# Altium PCB V2.3.PcbDoc
Units mm, origin at the board's own origin, x right, y up, seen from the top; angles counter-clockwise.
Board outline 50 x 60 mm, 2 copper layers (Top Layer, Bottom Layer), stack 1.57 mm thick; 57 components, 44 nets, 218 pads, 88 vias.
Unrouted connection lines stored in the file: 2.
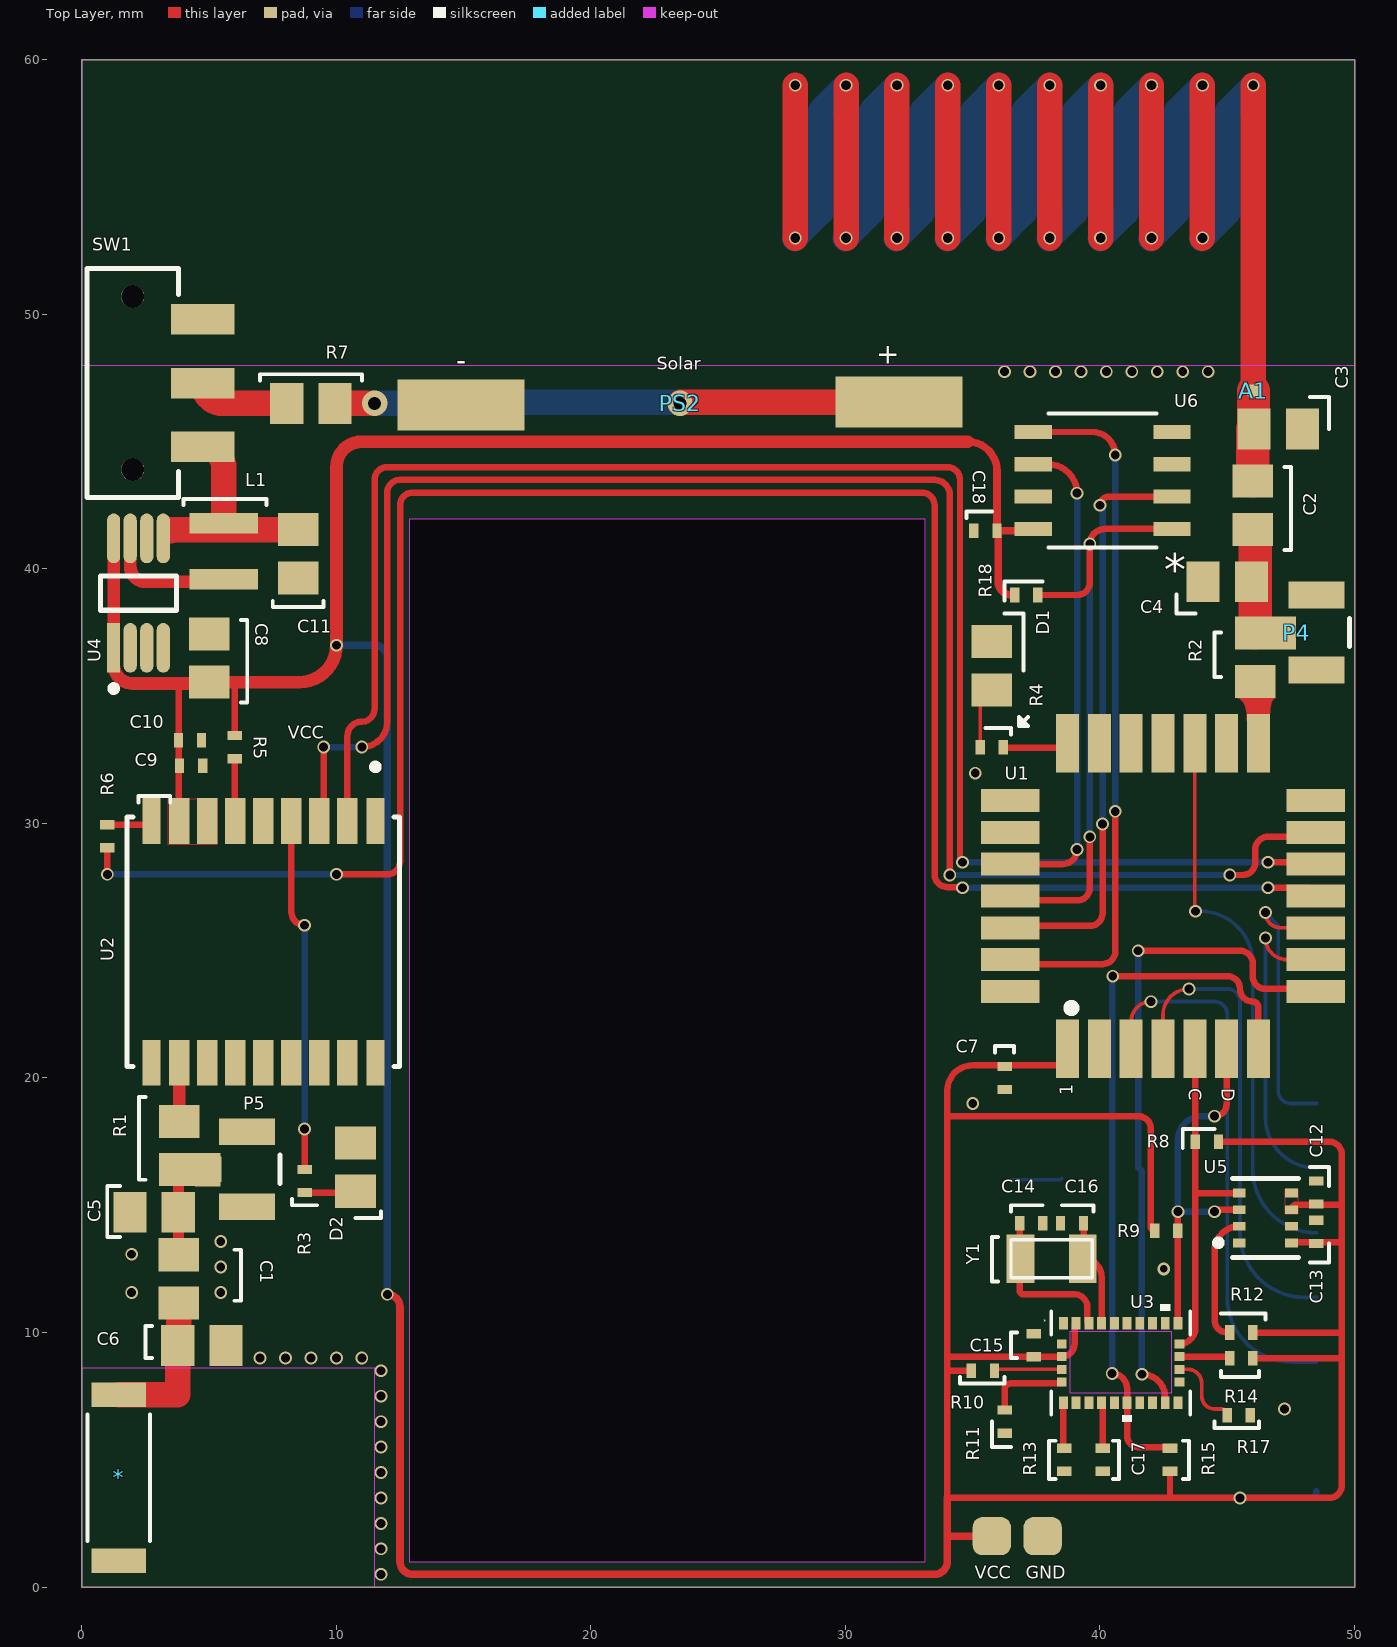
[diagram p0: Top Layer view]
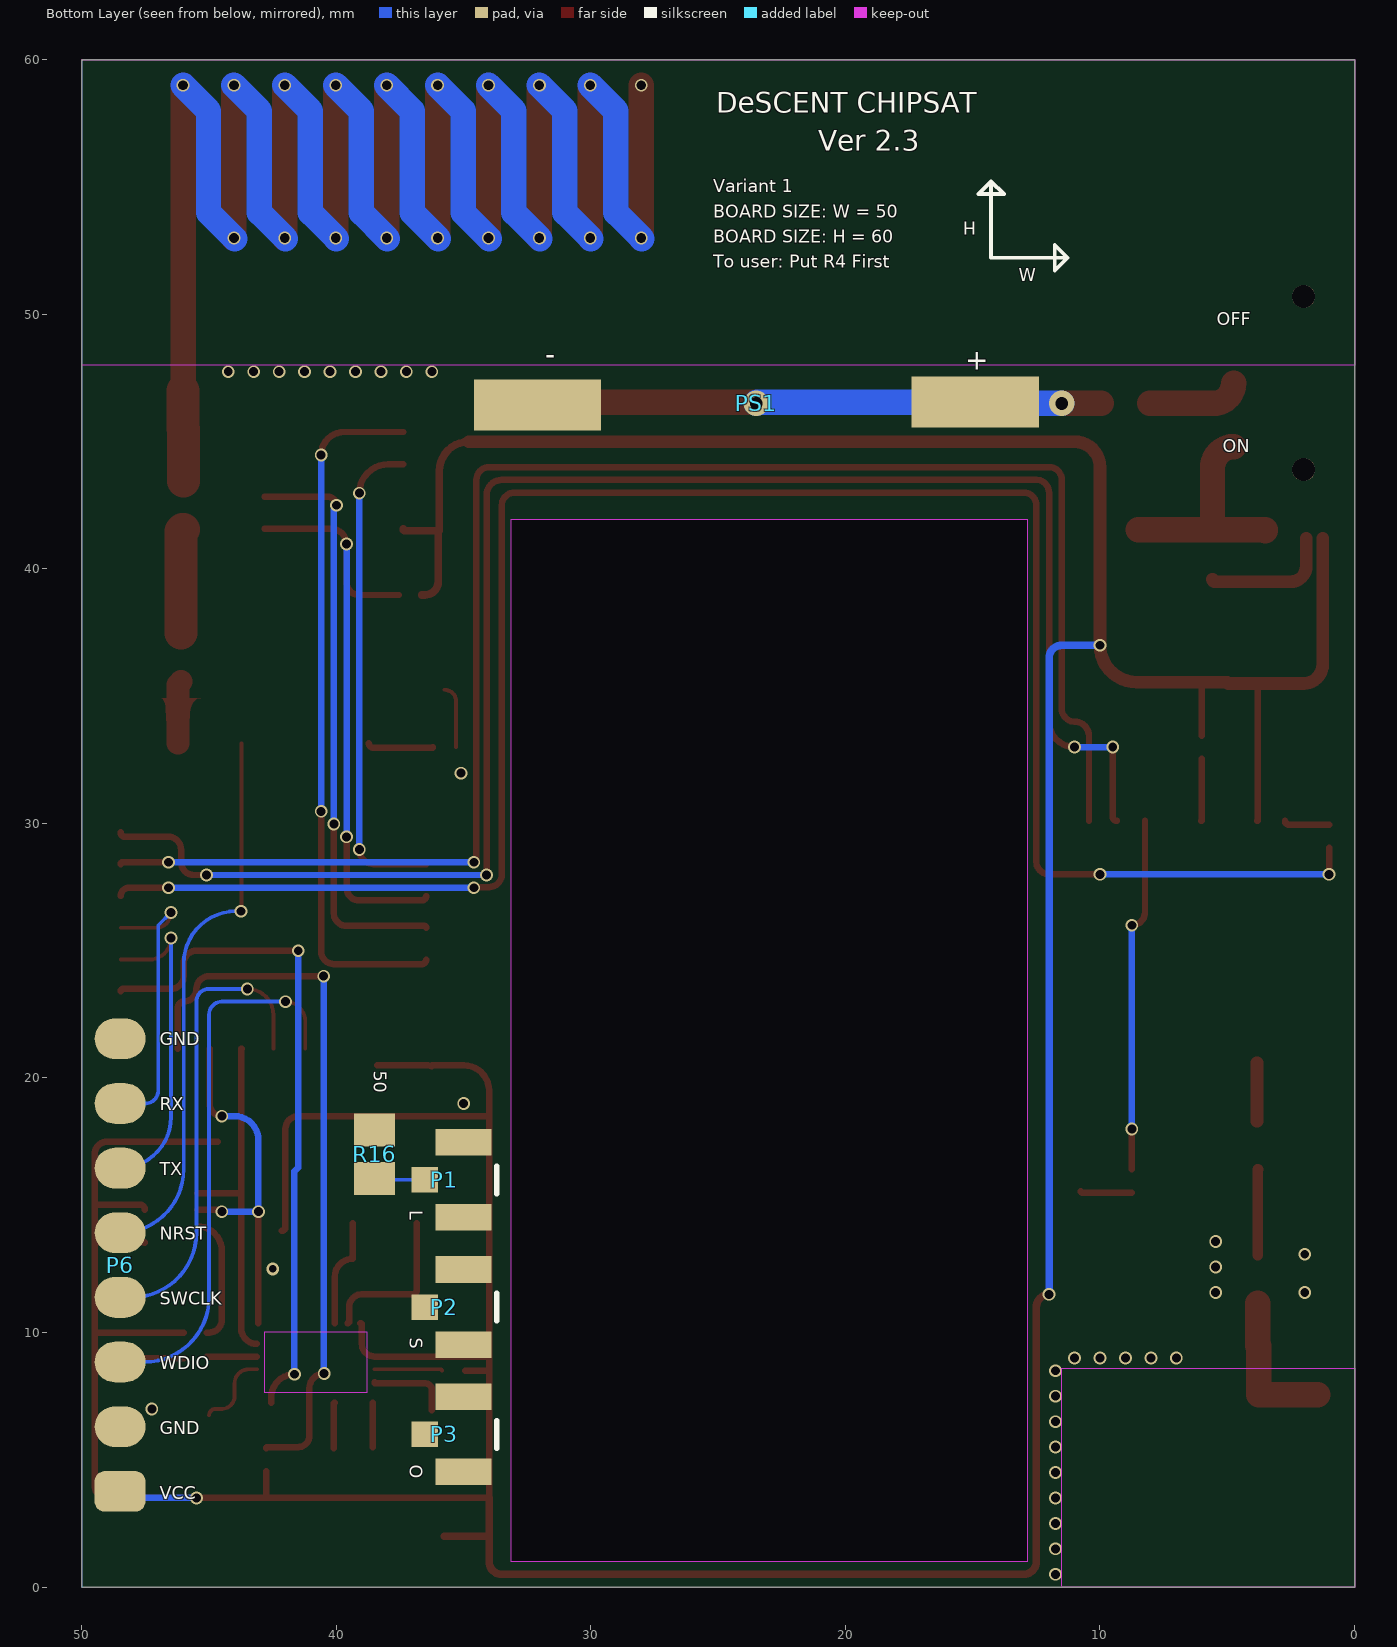
[diagram p1: Bottom Layer view, seen from below]

## Layer stack, top to bottom
Top Solder: solder mask 0.0254, SM-001, Dk 4
Top Layer: signal copper 0.035
Dielectric 1: dielectric 1.5, FR-4, Dk 4.8
Bottom Layer: signal copper 0.035
Bottom Solder: solder mask 0.0254, SM-001, Dk 4

## Board outline
0,0 0,60 50,60 50,0
cut-out: 33.138,1 33.138,41.95 12.862,41.95 12.862,1

## Design rules (kind name [scope] priority, off if disabled: settings)
Clearance [All] p1: gap=0.1 ignorepadtopadclearanceinfootprint=TRUE
ComponentClearance ComponentClearance_1 [InComponent('PS1')] p1: gap=0 collisioncheckmode=3 verticalgap=0 showdistances=FALSE
ComponentClearance [All] p2: gap=0 collisioncheckmode=3 verticalgap=0 showdistances=FALSE
MaxMinImpedance "Schematic Impedance Constraint_3" [InNet('LoRa_ANT_Tuning')] p1: minimum=49.00 maximum=51.00
MaxMinImpedance "Schematic Impedance Constraint_2" [InNet('PI_NETWORK_LoRa')] p2: minimum=49.00 maximum=51.00
MaxMinImpedance "Schematic Impedance Constraint_1" [InNet('LoRa_ANT')] p3: minimum=49.00 maximum=51.00
MaxMinImpedance "Schematic Impedance Constraint" [InNet('PI_NETWORK_GPS')] p4: minimum=49.00 maximum=51.00
PlaneClearance [All] p1 off: clearance=0.508
PlaneConnect PlaneConnect_1 [InNet('VCC')] p1: planeconnectstyle=Direct reliefexpansion=0.508 reliefentries=4 reliefconductorwidth=0.254 reliefairgap=0.254
PlaneConnect [InNet('GND')] p2: planeconnectstyle=Direct reliefexpansion=0.508 reliefentries=4 reliefconductorwidth=0.254 reliefairgap=0.254
PolygonConnect [All] p1: connectstyle=Direct reliefconductorwidth=0.254 reliefentries=4 polygonreliefangle="90 Angle" airgapwidth=0.254
RoutingVias [All] p1: holewidth=0.711 width=1.27 viastyle="Through Hole" minholewidth=0.711 minwidth=1.27 maxholewidth=0.711 maxwidth=1.27
SolderMaskExpansion [All] p1: expansion=0.102 istentingtop=FALSE
SupplyNets "Schematic Supply Nets_1" [InNet('VCC')] p1: voltage=0.000
SupplyNets "Schematic Supply Nets" [InNet('GND')] p2: voltage=0.000
Width Width_1 [All] p1 off: maxlimit=0.254 minlimit=0.254 preferedwidth=0.254
Width [All] p2: maxlimit=2 minlimit=0.14 preferedwidth=0.254 minimp=50.000000 maximp=50.000000 favimp=50.000000 checkconnectedcopper=TRUE // min width
27 further rules are at their usual default settings.

## Classes and differential pairs
polygon class PolygonClass_1: GND_L01_P006

## Components (designator, comment, footprint, x,y, rotation, side; value= is the part's Value field where it differs from the comment)
* "GPS_ANT_NO_KO" GPS_ANT_NO_KO 0.949,4.2 r90 top
A1 "TI_HELICAL" TI_HELICAL 28,47 r0 top
C1 "C0402C223K8PACTU" PI_NET_CAPACITOR_0805 3.802,12.104 r270 top value="22,000 pF"
C2 "C0402C223K8PACTU" PI_NET_CAPACITOR_0805 46,42.5 r90 top value="22,000 pF"
C3 "C0402C223K8PACTU" PI_NET_CAPACITOR_0805 47,45.5 r0 top value="22,000 pF"
C4 "C0402C223K8PACTU" PI_NET_CAPACITOR_0805 45,39.5 r180 top value="22,000 pF"
C5 "C0402C223K8PACTU" PI_NET_CAPACITOR_0805 2.837,14.72 r180 top value="22,000 pF"
C6 "C0402C223K8PACTU" PI_NET_CAPACITOR_0805 4.716,9.488 r0 top value="22,000 pF"
C7 "4.7uF" 0402 36.25,20 r270 top
C8 "47uF" 0805Cap 5,36.5 r270 top value="22,000 pF"
C9 "0.1uF" 0402 4.248,33.273 r0 top
C10 "10uF" 0402 4.294,32.273 r0 top
C11 "47uF" 0805Cap 8.501,40.595 r90 top value="22,000 pF"
C12 "0.1uF" 0402 48.5,15.5 r90 top
C13 "10uF" 0402 48.5,13.954 r90 top
C14 "22pF" 0402 37.3,14.3 r0 top
C15 "0.1uF" 0402 37.4,9.5 r90 top
C16 "22pF" 0402 38.9,14.3 r180 top
C17 "0.1uF" 0402 40.1,5 r270 top
C18 "100nF" 0402 35.5,41.5 r180 top
D1 "LTST-C191TBKT" 0805LED 35.75,36.2 r270 top
D2 "LTST-C191TBKT" 0805LED 10.75,16.5 r270 top
L1 "10uH" "ASPI-0315FS_ASPI-0315FS - The_real_one" 5.58,40.699 r90 top
P1 "U.FL-R-SMT-1(01)" UFL 35,16 r270 bottom
P2 "U.FL-R-SMT-1(01)" UFL 35,11 r270 bottom
P3 "U.FL-R-SMT-1(01)" UFL 35,6 r270 bottom
P4 "U.FL-R-SMT-1(01)" UFL 48.5,37.5 r270 top
P5 "U.FL-R-SMT-1(01)" UFL 6.486,16.416 r270 top
P6 "61300811121" "8pinhead Slightly wider" 48.5,12.65 r90 bottom
PS1 "ALTA_CELL" ALTA_CELL_SAME_SIZED_FEET_SLIM 23.5,46.5 r90 bottom
PS2 "ALTA_CELL" ALTA_CELL_SAME_SIZED_FEET_SLIM 23.5,46.5 r90 top
R1 "0805Resistor" 0805Res 3.832,17.348 r270 top
R2 "0805Resistor" 0805Res 46.1,36.525 r90 top
R3 "1k" 0402 8.75,15.954 r270 top
R4 "1k6" 0402 35.75,33 r0 top
R5 "0k" 0402 6,33 r270 top
R6 "0k" 0402 1,29.5 r90 top
R7 "0805Resistor" 0805Res 9,46.5 r180 top
R8 "2.2k" 0402 44.2,17.5 r0 top
R9 "2.2k" 0402 42.6,14 r180 top
R10 "10k" 0402 35.4,8.5 r180 top
R11 "10k" 0402 36.25,6.5 r270 top
R12 "4.7k" 0402 45.546,10 r0 top
R13 "10k" 0402 38.6,5 r270 top
R14 "10k" 0402 45.546,8.996 r180 top
R15 "10k" 0402 42.75,5 r270 top
R16 "0805Resistor" RCL_M0805 38.5,17 r90 bottom
R17 "10k" 0402 45.454,6.75 r0 top
R18 "10k" 0402 37.1,38.975 r0 top
SW1 "JS102011SAQN" Slide_Switch 2,47.302 r270 top
U1 "MODULE_LORA_E5" MODULE28P-1-25-12X12X2-5MM 42.475,27.15 r90 top
U2 "MAX-M10S-00B" GPS_MAX_10 7.132,25.348 r270 top
U3 "BNO085" QFN28_BNO086_CEV 40.814,8.805 r0 top
U4 "L6920" L6920DBTR 2.225,39.05 r90 top
U5 "BME280" FP-BME280-MFG 46.5,14.5 r180 top
U6 "W25Q16JVSNIQ" SOIC_150MIL_WIN 40.1,43.475 r180 top
Y1 "IMU_CLK_9HT10-32.768KBZF-T" IMU_CLK_XTAL320X150X75 38.1,12.9 r180 top

## Footprints (in the part's own frame and the unit in brackets; to place one, negate y for a bottom-side part, rotate by r counter-clockwise, add the part's x,y. Pads: shape width x height; smd on the part's side, far side on the other; paste and mask are expansions set on the pad)
"8pinhead Slightly wider" [mm] "Pin Header, pitch 2.54 mm, THT, Vertical, single row, 8p"
  rrect50% 1.6x2 smd: 1(-8.89,0)
  oval 1.6x2 smd: 2(-6.35,0) 3(-3.81,0) 4(-1.27,0) 5(1.27,0) 6(3.81,0) 7(6.35,0) 8(8.89,0)
0402 [mm]
  rect 0.365x0.572 smd paste+0 mask+0: 1(-0.454,0) 2(0.454,0)
  body extent -0.5,-0.25 0.5,0.25, height 0.4
0805Cap [mm]
  rect 1.3x1.6 smd: 1(-0.95,0) 2(0.95,0)
  body extent -1,-0.63 1,0.63, height 0.7
0805LED [mm]
  rect 1.3x1.6 smd: 1(-0.95,0) 2(0.95,0)
  body extent -1,-0.63 1,0.63, height 1.1
0805Res [mm]
  rect 1.3x1.6 smd: 1(-0.95,0) 2(0.95,0)
  body extent -1,-0.63 1,0.63, height 0.6
ALTA_CELL_SAME_SIZED_FEET_SLIM [mm] "SAME SIZED FEET AND CORRECT POLARITY AND SILK CUT"
  rect 2x5 smd: +(0.056,-8.603) -(-0.055,8.603)
"ASPI-0315FS_ASPI-0315FS - The_real_one" [mil]
  rect 31.5x106.3 smd: 1(-43.31,0) 2(43.31,0)
  body extent -59,-59 59,59, height 30
FP-BME280-MFG [mm]
  rect 0.5x0.35 smd paste+0 mask+0: 1(1.025,0.975) 2(1.025,0.325) 3(1.025,-0.325) 4(1.025,-0.975) 5(-1.025,-0.975) 6(-1.025,-0.325) 7(-1.025,0.325) 8(-1.025,0.975)
  silkscreen extent -1.3,-1.55 1.97,1.55, body extent -1.25,-1.25 1.25,1.25, height 1
GPS_ANT_NO_KO [mm]
  rect 0.963x2.16 smd paste+0 mask+0: 1(3.363,-0.5) 2(-3.163,-0.5)
  silkscreen extent -2.39,-1.73 2.59,0.73, body extent -3.49,-1.6 3.69,0.61, height 0.89
GPS_MAX_10 [mm]
  rect 1.8x0.7 smd paste-1000 mask+0: 1(-4.75,4.4) 9(-4.75,-4.4) 10(4.75,-4.4) 18(4.75,4.4)
  rect 1.8x0.8 smd paste-1000 mask+0: 2(-4.75,3.3) 3(-4.75,2.2) 4(-4.75,1.1) 5(-4.75,0) 6(-4.75,-1.1) 7(-4.75,-2.2) 8(-4.75,-3.3) 11(4.75,-3.3) 12(4.75,-2.2) 13(4.75,-1.1) 14(4.75,0) 15(4.75,1.1) 16(4.75,2.2) 17(4.75,3.3)
  silkscreen extent -7,-5.35 4.9,5.35, body extent -5.75,-5.45 5.75,5.45, height 0.25
IMU_CLK_XTAL320X150X75 [mil]
  rect 43x75 smd: 1(-48,0) 2(48,0)
  silkscreen extent -63,-30 63,30, body extent -63,-30 63,30, height 33
L6920DBTR [mm]
  rect 1.954x0.516 smd paste+0 mask+0: 1(-2.15,0.975)
  rrect100% 1.954x0.516 smd paste+0 mask+0: 2(-2.15,0.325) 3(-2.15,-0.325) 4(-2.15,-0.975) 5(2.15,-0.975) 6(2.15,-0.325) 7(2.15,0.325) 8(2.15,0.975)
  silkscreen extent -3.87,-1.5 0.67,1.5, body extent -2.45,-1.5 2.45,1.5, height 1.1
MODULE28P-1-25-12X12X2-5MM [mm]
  rect 2.3x0.9 smd: 1(-6,3.75) 2(-6,2.5) 3(-6,1.25) 4(-6,0) 5(-6,-1.25) 6(-6,-2.5) 7(-6,-3.75) 15(6,-3.75) 16(6,-2.5) 17(6,-1.25) 18(6,0) 19(6,1.25) 20(6,2.5) 21(6,3.75)
  rect 0.9x2.3 smd: 8(-3.75,-6) 9(-2.5,-6) 10(-1.25,-6) 11(0,-6) 12(1.25,-6) 13(2.5,-6) 14(3.75,-6) 22(3.75,6) 23(2.5,6) 24(1.25,6) 25(0,6) 26(-1.25,6) 27(-2.5,6) 28(-3.75,6)
  silkscreen extent -4.53,3.47 -4.27,3.73, body extent -7.15,-7.15 7.15,7.15, height 2.49
PI_NET_CAPACITOR_0805 [mm]
  rect 1.3x1.6 smd: 1(-0.95,0) 2(0.95,0)
  body extent -1,-0.63 1,0.63, height 0.6
QFN28_BNO086_CEV [mil]
  rect 13.78x19 smd paste+0 mask+0: 1(-88.58,61.5) 6(-88.58,-61.5) 7(-68.9,-61.5) 8(-49.21,-61.5) 9(-29.53,-61.5) 10(-9.84,-61.5) 11(9.84,-61.5) 12(29.53,-61.5) 13(49.21,-61.5) 14(68.9,-61.5) 15(88.58,-61.5) 20(88.58,61.5) 21(68.9,61.5) 22(49.21,61.5) 23(29.53,61.5) 24(9.84,61.5) 25(-9.84,61.5) 26(-29.53,61.5) 27(-49.21,61.5) 28(-68.9,61.5)
  rect 15x13.78 smd paste+0 mask+0: 2(-91,29.53) 3(-91,9.84) 4(-91,-9.84) 5(-91,-29.53) 16(91,-29.53) 17(91,-9.84) 18(91,9.84) 19(91,29.53)
  silkscreen extent -108,-91 107,91, body extent -102,-75 102,75, height 46
RCL_M0805 [mm]
  rect 1.3x1.6 smd: 1(-0.95,0) 2(0.95,0)
Slide_Switch [mm] "JS102011SAQN"
  rect 1.2x2.5 smd paste+0 mask+0: 1(-2.5,2.75) 2(0,2.75) 3(2.5,2.75)
  round 0.9 hole 0.9 unplated paste-2539.97 mask+0: ""(-3.4,0) ""(3.4,0)
  silkscreen extent -4.5,-1.8 4.5,1.8, body extent -4.5,-3.75 4.5,3.75, height 3.22
SOIC_150MIL_WIN [mil]
  rect 57.5x22 smd paste+0 mask+0: 1(-107.25,75) 2(-107.25,25) 3(-107.25,-25) 4(-107.25,-75) 5(107.25,-75) 6(107.25,-25) 7(107.25,25) 8(107.25,75)
  silkscreen extent -84,-104 84,104, body extent -122,-99 122,99, height 69
TI_HELICAL [mm] "https://www.ti.com/lit/an/swra416/swra416.pdf?ts=1758177641491&ref_url=https%253A%252F%252Fduckduckgo.com%252F"
  rrect50% 0.5x0.5 smd mask+0: 1(18.024,0)
  Top Layer lines w1: 0.024,6 0.024,12 ; 2.024,6 2.024,12 ; 4.024,6 4.024,12 ; 6.024,6 6.024,12 ; 8.024,6 8.024,12 ; 10.024,6 10.024,12 ; 12.024,6 12.024,12 ; 14.024,6 14.024,12 ; 16.024,6 16.024,12 ; 18.024,0 18.024,12
  Bottom Layer lines w1: 0,5.977 1,6.977 ; 1.024,7.001 1.024,11 2.024,12 ; 2,5.977 3,6.977 ; 3.024,7.001 3.024,11 4.024,12 ; 4,5.977 5,6.977 ; 5.024,7.001 5.024,11 6.024,12 ; 6,5.977 7,6.977 ; 7.024,7.001 7.024,11 8.024,12 ; 8,5.977 9,6.977 ; 9.024,7.001 9.024,11 10.024,12 ; 10,5.977 11,6.977 ; 11.024,7.001 11.024,11 12.024,12 ; 12,5.977 13,6.977 ; 13.024,7.001 13.024,11 14.024,12 ; 14,5.977 15,6.977 ; 15.024,7.001 15.024,11 16.024,12 ; 16,5.977 17,6.977 ; 17.024,7.001 17.024,11 18.024,12
UFL [mm] "SMT, 3-Leads, Body 2.6x2.6mm"
  rect 1.05x2.2 smd: 1(-1.475,0) 2(1.475,0)
  rect 1x1.05 smd: 3(0,-1.525)
  silkscreen extent -0.55,1.3 0.55,1.3, body extent -1.3,-1.3 1.3,1.3, height 1.25

## Part data
* A1: "helical_antenna schematic for the DeSCENT v1 ChipSat"
C1 C2 C3 C4 C5 C6: library part 0805RFCapacitor_NO_SILK, "CAP0805", Capacitance="22,000 pF", Manufacturer=Kemet, Package=C0402-BB, Temperature="-55°C to +125°C", Temperature Characteristic=X5R, Temperature Coefficient=15%, Temperature Range High=+125°C, Temperature Range Low=-55°C, Tolerance=0.1, Voltage Rating="10 V", Automotive=No, Category=Cap, ComponentLink2Description=Datasheet, ComponentLink2URL=https://content.kemet.com/datasheets/KEM_C1002_X7R_SMD.pdf, Device Class L1="Passive Components", Device Class L2=Capacitors, Device Class L3="Ceramic Capacitors", Digikey Description="CAP CER 0.022UF 10V X5R 0402", Height=0.55mm, Ipc Land Pattern Name=CAPC10050X50, Lead Free=Yes, Manufacturer Part Number=C0402C223K8PACTU, Material=Ceramic, Mouser Description="Multilayer Ceramic Capacitors MLCC - SMD/SMT 10volts 22000pF X5R 10%", Octopart=https://octopart.com/c0402c223k8pactu-kemet-140074, RoHS=TRUE
C7 C9 C10 C12 C13 C14 C15 C16 C17: library part C-EUC0805K, "CAPACITOR, European symbol", DeviceName=C0805K, DeviceSetName=C-EU, GateName_1=G$1, LibraryName=rcl, SymbolName_1=C-EU
C8 C11: library part 0805Capacitor, "CAP CER 0.022UF 10V X5R 0402", Capacitance="22,000 pF", Manufacturer=Kemet, Manufacturer Part Number=C0402C223K8PACTU, Package=C0402-BB, Temperature="-55°C to +125°C", Temperature Characteristic=X5R, Temperature Coefficient=15%, Temperature Range High=+125°C, Temperature Range Low=-55°C, Tolerance=0.1, Voltage Rating="10 V", Automotive=No, Category=Cap, ComponentLink2Description=Datasheet, ComponentLink2URL=https://content.kemet.com/datasheets/KEM_C1002_X7R_SMD.pdf, Device Class L1="Passive Components", Device Class L2=Capacitors, Device Class L3="Ceramic Capacitors", Digikey Description="CAP CER 0.022UF 10V X5R 0402", Height=0.55mm, Ipc Land Pattern Name=CAPC10050X50, Lead Free=Yes, Material=Ceramic, Mouser Description="Multilayer Ceramic Capacitors MLCC - SMD/SMT 10volts 22000pF X5R 10%", Octopart=https://octopart.com/c0402c223k8pactu-kemet-140074, RoHS=TRUE
C18: library part RCL_C-EUC0805, Package=RCL_C0805, DeviceName=C0805, DeviceSetName=RCL_C-EU, GateName_1=G$1, LibraryName=AmbaSat-1v1-01-NO-solar, SymbolName_1=RCL_C-EU
D1 D2: library part 0805LED, "LED BLUE CLEAR CHIP SMD", Case Code (Imperial)=0603, Case Code (Metric)=1608, Color=Blue, Forward Current=20mA, Forward Voltage=3.8V, Lens Color=Colorless, Max Operating Temperature=80°C, Max Power Dissipation=75mW, Min Operating Temperature=-20°C, Package Quantity=1, Power Dissipation=76mW, Reverse Voltage=5V, Case/Package=0603, Depth=1.6mm, Dominant Wavelength=475nm, Height=0.55mm, Illumination Color=Blue, Lead Free="Lead Free", Length=0.8mm, Lens Style=Diffused, Lens Transparency=Clear, Luminous Intensity=180mcd, Mount="Surface Mount", Number of Elements=1, Number of LEDs=1, Number of Pins=2, Packaging="Tape and Reel", Radiation Hardening=No, Test Current=20mA, Viewing Angle=130°, Wavelength=468nm, Width=0.8mm
L1: library part ASPI-0315FS, DeviceSetName=ASPI-0315FS, GateName_1=G$1, LibraryName=ASPI-0315FS, SymbolName_1=ASPI-0315FS
P1 P2 P3 P4 P5: library part UFL, "Ultra Small Coaxial Connector, 6 GHz, -40 to 90 degC, 3-Pin SMD, RoHS, Bulk", Dielectric Material=LiquidCrystalPolymer(LCP), Frequency - Max=6GHz, Housing Color=Silver, Manufacturer="Hirose Electric", Operating Temperature=-40degC~90degC, Package Description="3-Pin Surface Mount Device, Body 2.6 x 2.6 mm", Package Reference=U.FL-R-SMT, Standard Package=100, Body Finish=Silver, Body Material=PhosphorBronze, Category=Connectors,Interconnects, Center Contact Material=PhosphorBronze, Center Contact Plating=Gold, Connector Style=U.FL, Connector Type=Jack,MalePin, Contact Termination=Solder, Datasheet URL=https://datasheet.ciiva.com/26945/getdatasheetpartid-475239-26945414.pdf, Datasheet Version=Feb-09, Dynamic Catalog=U.FLSeries, Family=CoaxialConnectors(RF), Fastening Type=Snap-On, Featured Product=HiroseU.FLSeries, Impedance=50Ohm, Manufacturer URL=https://www.hirose.com, Minimum Quantity=UltraMiniatureCoaxial, Mounting Type=SurfaceMount, Online Catalog=U.FLSeries, Other Names="H122041 / U.FL-R-SMT-1(01)-ND", Packaging=Bulk, Quantity Available=Bulk, Series=U.FL, Shield Termination=Solder, Unit PriceUSD=U.FL
P6: library part 8pinhead, Color=Black, Contact Resistance=20mΩ, Current Rating=3A, Max Operating Temperature=105°C, Min Operating Temperature=-40°C, Operating Supply Voltage=250V, Connector Type="Male Pin", Contact Material=Copper, Contact Mating Length=5.9944mm, Contact Plating=Gold, Gender=Male, Height=8.54mm, Lead Pitch=2.54mm, Mount="Through Hole", NexarPartId=32855533, Number of Contacts=8, Number of Pins=8, Number of Positions=8, Number of Rows=1, Orientation=Vertical, Packaging=Bulk, Pitch=2.54mm, REACH SVHC=Unknown, RoHS=Compliant, Termination=Solder, Voltage Rating=250V
PS1 PS2: library part ALTA_CELL_RESIZED_SLIM, "No SILK", DeviceSetName=ALTA_CELL, GateName_1=G$1, LibraryName=ALTA_CELL, SymbolName_1=ALTA_CELL
R1 R2 R7 R16: "RESISTOR, European symbol", DeviceName=M0805, DeviceSetName=R-EU_, GateName_1=G$1, LibraryName=rcl, SymbolName_1=R-EU
R3 R4 R5 R6 R8 R9 R10 R11 R12 R13 R14 R15 R17 R18: library part R-EU_M0805, "RESISTOR, European symbol", DeviceName=M0805, DeviceSetName=R-EU_, GateName_1=G$1, LibraryName=rcl, SymbolName_1=R-EU
SW1: library part Slide_Switch, "SWITCH SLIDE SPDT 300MA 6V /  / JS102011SAQN", Case/Package=100, Contact Current Rating=300mA, Contact Resistance=70mR, Max Operating Temperature=85°C, Max Voltage Rating (DC)=6V, Min Operating Temperature=-40°C, Package Quantity=1, Actuator Length=2mm, Actuator Material=Nylon, Actuator Type=Standard, Contact Material="Copper Alloy", Contact Plating=Silver, Current Rating=300mA, Electrical Life=5000Cycles, Housing Material=Nylon, Illumination Type=Non-Illuminated, Lead Free="Lead Free", Length=9mm, Max Current Rating=300mA, Mount="Surface Mount", Orientation="Right Angle", Packaging="Tape and Reel", Radiation Hardening=No, REACH SVHC="No SVHC", Switch Function=On-On, Switch Travel=2mm, Termination="Gull Wing", Throw Configuration=SPDT, Voltage Rating (DC)=6V
U1: Package=MODULE28P-1.25-12X12X2.5MM, DeviceSetName=MODULE_LORA_E5, GateName_1=G$1, LibraryName=LORA-E5_Eagle_Library, SymbolName_1=MOUDLE_LORA_E5
U2: library part GPS_MAX_10, "GNSS LCC RX, ROM, TCXO, LNA, SAW"
U3: library part BNO086, "No Description Available", Mfr_Name=CEVA, RefDes=RefDes, Type="Motion Sensors"
U4: library part L6920DBTR, "Voltage stepper upper L6920DTR model", DeviceSetName=L6920, GateName_1=G$1, LibraryName=L6920, SymbolName_1=L6920
U5: "Temp and huminity sensor"
U6: "No Description Available", Mfr_Name=Winbond, RefDes=RefDes, Type=Type
Y1: "32.768 kHz Â±50ppm Crystal 12.5pF 70 kOhms 2-SMD, No Lead", Package="SMD-2 TXC Corporation", Check_prices=https://www.snapeda.com/parts/9HT10-32.768KBZF-T/TXC/view-part/?ref=eda, MF=TXC, MP=9HT10-32.768KBZF-T, SnapEDA_Link=https://www.snapeda.com/parts/9HT10-32.768KBZF-T/TXC/view-part/?ref=snap

## Free pads (board coordinates)
  rect 1x1.3 smd: 1(47.193,37.48) 3(4.945,16.397)
  rect 0.5x1 smd: 2(3.794,16.412)
  rrect50% 1.5x1.5 smd: GND(37.75,2) VCC(35.75,2)

## Via types
v1: diameter 0.5, hole 0.35, Top Layer to Bottom Layer, tented both sides, 35 vias
v2: diameter 0.5, hole 0.35, Top Layer to Bottom Layer, 31 vias
v3: diameter 0.5, hole 0.38, Top Layer to Bottom Layer, 19 vias
v4: diameter 1, hole 0.5, Top Layer to Bottom Layer, tented both sides, 2 vias
v5: diameter 0.5, hole 0.3, Top Layer to Bottom Layer, tented both sides, 1 vias

## Nets (pads, with @x,y where several pads share a name; then routed paths per layer and width w, separated by ;. In a path a pad name is that pad's centre, name@x,y a point inside that pad or via, vN(x,y) a via of type N, cw(c..) or ccw(c..) an arc to the next point about the centre after c; other vN are vias at no path point)
CS: R18.2 U1.25 U6.1 | length 24.4
  Top Layer w0.254: U1.25 ccw(c36.65,27.15) 36.65,26.975 39.1,26.975 ccw(c39.1,27.475) 39.6,27.475 v1(39.6,29.475) ; R18.2 39.1,38.975 ccw(c39.1,39.475) 39.6,39.475 v1(39.6,40.975) cw(c40.195,40.975) 40.195,41.57 U6.1
  Bottom Layer w0.254: v1(39.6,29.475) v1(39.6,40.975)
GND: C3.2 C4.2 C5.2 C6.2 C7.2 C8.1 C9.2 C10.2 C11.1 C12.2 C13.2 C14.2 C15.2 C16.2 C17.2 C18.2 D1.1 D2.1 P1.1 P1.2 P2.1 P2.2 P2.3 P3.1 P3.2 P4.1 P4.2 P5.1 P5.2 P6.2 P6.8 pad.GND PS1.- PS2.- R11.2 R13.2 R16.2 R17.2 U1.2 U1.14 U1.16 U1.22 U2.1 U2.10 U2.12 U3.2 U3.10 U3.25 U4.6 U5.1 U5.7 U6.4
  other v1: 47.25,7 35,19 35.1,31.975
  other v2: 11.75,0.5 11.75,1.5 11.75,2.5 11.75,3.5 11.75,4.5 11.75,5.5 11.75,6.5 11.75,7.5 11.75,8.5 7,9 8,9 9,9 10,9 11,9 1.957,11.576 5.457,11.576 5.457,12.576 1.957,13.076 5.457,13.576 36.25,47.75 37.25,47.75 38.25,47.75 39.25,47.75 40.25,47.75 41.25,47.75 42.25,47.75 43.25,47.75 44.25,47.75
  other v5: 42.5,12.5
GPS_ANT: *.1 C1.2 C6.1 | length 5.9
  Top Layer w1: *.1 3.766,7.563 C6.1 3.802,9.488 C1.2
GPS_ANT_Tuning: C1.1 C5.1 P5.3 pad.2 pad.3 R1.2 | length 3.4
  Top Layer w0.43: pad.2 3.802,16.412 C1.1
GPS_RESET: R6.1 U1.11 | length 78.4
  Top Layer w0.254: v1(1,28) R6.1 ; v1(10,28) 12,28 ccw(c12,28.5) 12.5,28.5 12.5,42.5 cw(c13,42.5) 13,43 33,43 cw(c33,42.5) 33.5,42.5 33.5,27.997 33.503,27.997 ccw(c34,27.997) 34,27.5 cw(c34,27.246) 34.006,27.5 34.089,27.498 ccw(c34.1,27.975) 34.103,27.498 34.489,27.5 34.575,27.5 cw(c34.575,27.475) v1(34.6,27.475) ; v1(46.6,27.475) 48.15,27.475 cw(c48.15,27.15) U1.11
  Bottom Layer w0.254: v1(1,28) v1(10,28) ; v1(34.6,27.475) v1(46.6,27.475)
GPS_RX: U1.12 U2.2 | length 66.6
  Top Layer w0.254: U2.2 10.432,33.432 cw(c11,33.432) 11,34 ccw(c11,34.5) 11.5,34.5 11.5,43.5 cw(c12,43.5) 12,44 34,44 cw(c34,43.5) 34.5,43.5 34.5,28.575 ccw(c34.6,28.575) v1(34.6,28.475) ; v1(46.6,28.475) 48.4,28.475 cw(c48.4,28.4) U1.12
  Bottom Layer w0.254: v1(34.6,28.475) v1(46.6,28.475)
GPS_TX: U1.13 U2.3 | length 68.3
  Top Layer w0.254: U2.3 ccw(c9.332,30.266) 9.5,30.266 v1(9.5,33) ; v1(11,33) ccw(c11,34) 12,34 12,43 cw(c12.5,43) 12.5,43.5 33.5,43.5 cw(c33.5,42.9) 34.1,42.9 v1(34.1,27.975) ; v1(45.1,27.975) 45.6,27.975 ccw(c45.6,28.475) 46.1,28.475 46.1,28.975 cw(c46.6,28.975) 46.6,29.475 48.3,29.475 ccw(c48.3,29.65) U1.13
  Bottom Layer w0.254: v1(9.5,33) v1(11,33) ; v1(34.1,27.975) v1(45.1,27.975)
IMU_INTN: U1.8 U3.14 | length 26.4
  Top Layer w0.254: v1(41.5,25) 45.5,25 cw(c45.5,24.5) 46,24.5 46,24 ccw(c46.5,24) 46.5,23.5 48.375,23.5 cw(c48.375,23.4) U1.8 ; v1(41.648,8.361) cw(c41.648,7.445) 42.564,7.445 U3.14
  Bottom Layer w0.254: v1(41.5,25) 41.5,16.481 41.648,16.333 v1(41.648,8.361)
IMU_RESET: R15.1 U1.7 U3.11 | length 28.4
  Top Layer w0.254: v1(40.48,8.386) cw(c40.48,7.802) 41.064,7.802 U3.11 41.064,5.936 ccw(c41.5,5.936) 41.5,5.5 42.704,5.5 cw(c42.704,5.454) R15.1 ; v1(40.5,24) 45,24 cw(c45,23.5) 45.5,23.5 ccw(c46,23.5) 46,23 cw(c46,22.775) 46.225,22.775 U1.7
  Bottom Layer w0.254: v1(40.48,8.386) 40.49,8.396 40.49,23.99 v1(40.5,24)
LoRa_ANT: A1.1 C2.2 C3.1 | length 3.6
  Top Layer w1.3: C2.2 46,45.5 46.024,45.524 A1.1
  other v3: 28.024,53 30.024,53 32.024,53 34.024,53 36.024,53 38.024,53 40.024,53 42.024,53 44.024,53 28.024,59 30.024,59 32.024,59 34.024,59 36.024,59 38.024,59 40.024,59 42.024,59 44.024,59 46.024,59
LoRa_ANT_Tuning: C2.1 C4.1 P4.3 pad.1 R2.2 | length 4.1
  Top Layer w1.3: C2.1 cw(c46,41.45) 46.1,41.45 R2.2
MISO: U1.26 U6.2 | length 23
  Top Layer w0.254: U1.26 cw(c36.55,25.9) 36.55,25.975 39.6,25.975 ccw(c39.6,26.475) 40.1,26.475 v1(40.1,29.975) ; v1(40,42.5) cw(c40.34,42.5) 40.34,42.84 U6.2
  Bottom Layer w0.254: v1(40,42.5) 40,42.433 40.1,42.333 v1(40.1,29.975)
MOSI: U1.27 U6.5 | length 27.8
  Top Layer w0.254: U1.27 ccw(c36.65,24.65) 36.65,24.475 40.1,24.475 ccw(c40.1,24.975) 40.6,24.975 v1(40.6,30.475) ; U6.5 39.695,45.38 cw(c39.695,44.475) v1(40.6,44.475)
  Bottom Layer w0.254: v1(40.6,30.475) v1(40.6,44.475)
NetC14_1: C14.1 U3.27 Y1.2 | length 6.3
  Top Layer w0.254: C14.1 36.849,14.3 36.849,12.9 36.849,11.651 ccw(c37,11.651) 37,11.5 39,11.5 cw(c39,11) 39.5,11 39.5,10.431 ccw(c39.564,10.431) U3.27
NetC16_1: C16.1 U3.26 Y1.1 | length 4.3
  Top Layer w0.254: C16.1 39.354,12.9 39.351,12.9 cw(c39.351,12.187) 40.064,12.187 U3.26
NetC17_1: C17.1 U3.9 | length 1.8
  Top Layer w0.254: U3.9 cw(c40.064,7.207) 40.1,7.207 C17.1
NetD1_2: D1.2 R4.1 | length 2.5
  Top Layer w0.15: R4.1 35.296,34.796 cw(c35.75,34.796) D1.2
NetD2_2: D2.2 R3.2 | length 2
  Top Layer w0.254: R3.2 10.7,15.5 ccw(c10.7,15.55) D2.2
NetL1_1: L1.1 U4.7 | length 5.2
  Top Layer w0.5: U4.7 1.9,40.1 ccw(c2.5,40.1) 2.5,39.5 5.481,39.5 ccw(c5.481,39.599) L1.1
NetP1_3: P1.3 R16.1 | length 2
  Bottom Layer w0.15: P1.3 38.45,16 R16.1
NetPS1_+: PS1.+ PS2.+ R7.1 | length 22.2
  Top Layer w1: R7.1 v4(11.5,46.5) ; v4(23.5,46.5) cw(c23.556,46.5) 23.556,46.556 PS2.+
  Bottom Layer w1: v4(11.5,46.5) 14.842,46.5 ccw(c14.842,46.556) PS1.+ 23.444,46.556 cw(c23.444,46.5) v4(23.5,46.5)
NetR3_1: R3.1 U2.4 | length 14
  Top Layer w0.254: U2.4 8.232,26.518 ccw(c8.75,26.518) v2(8.75,26) ; R3.1 v2(8.75,18)
  Bottom Layer w0.254: v2(8.75,18) v2(8.75,26)
NetR4_2: R4.2 U1.21 | length 2.6
  Top Layer w0.254: R4.2 ccw(c36.229,33) 36.229,32.975 38.55,32.975 ccw(c38.55,33.15) U1.21
NetR5_2: R5.2 U2.6 | length 2.5
  Top Layer w0.254: R5.2 6,30.098 U2.6
NetR6_2: R6.2 U2.9 | length 1.8
  Top Layer w0.254: R6.2 2.588,29.954 ccw(c2.588,30.098) U2.9
NetR7_2: R7.2 SW1.2 | length 3.8
  Top Layer w1: SW1.2 ccw(c5.552,47.302) 5.552,46.5 R7.2
NetR10_1: R10.1 U3.4 | length 2.7
  Top Layer w0.15: R10.1 cw(c35.909,8.5) 35.909,8.555 U3.4
NetR11_1: R11.1 U3.5 | length 3.2
  Top Layer w0.254: R11.1 36.25,7.75 cw(c36.5,7.75) 36.5,8 38.447,8 ccw(c38.447,8.055) U3.5
NetR12_1: R12.1 U5.2 | length 5.1
  Top Layer w0.254: R12.1 45,10 cw(c45,10.5) 44.5,10.5 44.5,13.2 cw(c45.475,13.2) U5.2
NetR13_1: R13.1 U3.6 | length 1.8
  Top Layer w0.15: R13.1@38.564,5.49 ccw(c38.6,5.49) R13.1
  Top Layer w0.254: R13.1@38.564,5.49 U3.6
NetR14_2: R14.2 U3.18 | length 2
  Top Layer w0.254: U3.18 R14.2@45.092,9.055
NetR17_1: R17.1 U3.17 | length 3.1
  Top Layer w0.15: U3.17 43.445,8.555 cw(c43.445,8) 44,8 44,7.5 ccw(c44.5,7.5) 44.5,7 44.75,7 cw(c44.75,6.75) R17.1
NRST: P6.5 U1.17 | length 22
  Top Layer w0.15: U1.17 43.725,26.575 ccw(c43.75,26.575) v1(43.75,26.55)
  Bottom Layer w0.15: v1(43.75,26.55) 43.95,26.55 cw(c43.95,24.5) 46,24.5 46,16.42 ccw(c48.5,16.42) P6.5
PI_NETWORK_GPS: R1.1 U2.11 | length 2.3
  Top Layer w0.5: R1.1 U2.11
PI_NETWORK_LoRa: R2.1 U1.15 | length 2.5
  Top Layer w0.9: R2.1 46.225,35.45 U1.15
RX: P6.6 U1.9 | length 12.6
  Top Layer w0.15: v1(46.5,25.5) ccw(c47.35,25.5) 47.35,24.65 U1.9
  Bottom Layer w0.15: v1(46.5,25.5) 46.5,18.46 ccw(c48.5,18.46) P6.6
SCK: U1.24 U6.6 | length 19.3
  Top Layer w0.254: U1.24 38.525,28.4 ccw(c38.525,28.975) v1(39.1,28.975) ; U6.6 37.965,44.11 cw(c37.965,42.975) v1(39.1,42.975)
  Bottom Layer w0.254: v1(39.1,28.975) v1(39.1,42.975)
SCL: R8.1 U1.5 U3.19 U5.4 | length 13.7
  Top Layer w0.254: U3.19 ccw(c43.125,10.176) 43.746,10.176 43.746,15.5 ; U1.5 cw(c43.725,21.129) 43.746,21.129 R8.1 43.746,15.5 ; U5.4 43.771,15.475 cw(c43.771,15.5) 43.746,15.5
SDA: R9.1 U1.6 U3.20 U5.3 | length 14.5
  Top Layer w0.254: U3.20 v1(43.064,14.75) ; v1(44.5,14.75) cw(c44.575,14.75) 44.575,14.825 U5.3 ; v1(44.5,18.5) ccw(c44.5,18.975) 44.975,18.975 U1.6
  Bottom Layer w0.254: v1(44.5,14.75) v1(43.064,14.75) 43.064,17.564 cw(c44,17.564) 44,18.5 v1(44.5,18.5)
SWCLK: P6.4 U1.4 | length 18.8
  Top Layer w0.15: U1.4 42.475,22.475 cw(c43.5,22.475) v1(43.5,23.5)
  Bottom Layer w0.15: v1(43.5,23.5) 45,23.5 cw(c45,23) 45.5,23 45.5,13.92 ccw(c48.04,13.92) 48.04,11.38 P6.4
SWDIO: P6.3 U1.3 | length 21.6
  Top Layer w0.15: U1.3 41.225,22.225 cw(c42,22.225) v1(42,23)
  Bottom Layer w0.15: v1(42,23) 44.5,23 cw(c44.5,22.5) 45,22.5 45,11.38 ccw(c47.54,11.38) 47.54,8.84 P6.3
TX: P6.7 U1.10 | length 11.3
  Top Layer w0.15: v1(46.5,26.5) ccw(c47.1,26.5) 47.1,25.9 U1.10
  Bottom Layer w0.15: v1(46.5,26.5) 47,26 47,19.5 ccw(c47.5,19.5) 47.5,19 P6.7
VCC: C7.1 C8.2 C9.1 C10.1 C12.1 C13.1 C15.1 C18.1 P6.1 pad.VCC R5.1 R8.2 R9.2 R10.2 R12.2 R14.1 R15.2 R18.1 U1.1 U2.7 U2.8 U3.3 U3.28 U4.1 U4.8 U5.5 U5.6 U5.8 U6.8 | length 217.5
  Top Layer w0.254: 3.8,35.5 3.8,30.098 U2.8 ; R5.1 6,35.55 ; R10.2 34,8.5 ; U1.1@38.402,20.499 36.409,20.499 C7.1 ccw(c36.204,20.454) 36.204,20.5 35,20.5 ccw(c35,19.5) 34,19.5 34,18.5 ; U3.28 ccw(c39.064,10.304) 39,10.304 39,9.553 cw(c38.502,9.553) U3.3 37.4,9.055 C15.1 34.054,9.046 cw(c34.054,9.1) 34,9.1 ; R9.2 cw(c42.146,14.146) 42,14.146 42,18 ccw(c41.5,18) 41.5,18.5 34,18.5 ; R15.2 42.75,3.5 ; R8.2 49,17.5 cw(c49,17) 49.5,17 49.5,15.023 ; R14.1 49.5,8.996 ; R12.2 49.5,10 ; U5.8 cw(c47.546,13.525) 47.546,13.546 49.5,13.546 ; U5.6 cw(c47.723,14.825) 47.723,15.023 49.5,15.023 ; 34,8.5 34,9.1 ; 34,8.5 34,3.5 42.75,3.5 ; 34,9.1 34,18.5 ; 42.75,3.5 v1(45.5,3.5) 49,3.5 ccw(c49,4) 49.5,4 49.5,8.996 ; 49.5,8.996 49.5,10 ; 49.5,10 49.5,13.546 ; 49.5,13.546 49.5,15.023
  Top Layer w0.3: v1(12,11.5) cw(c12,11) 12.5,11 12.5,1 ccw(c13,1) 13,0.5 33.5,0.5 ccw(c33.5,1) 34,1 34,2 ; 34,3.5 34,2 ; 34.8,45 cw(c34.8,43.846) 35.954,43.846 C18.1 ; pad.VCC 34,2 ; R18.1 36.525,38.975 cw(c36.525,39.5) 36,39.5 36,41.5 37.306,41.5 ccw(c37.306,41.57) U6.8
  Top Layer w0.5: U4.8 U4.1 1.25,36.25 ccw(c2,36.25) 2,35.5 3.8,35.5 4.95,35.5 ccw(c4.95,35.55) C8.2 6,35.55 8.55,35.55 ccw(c8.55,37) v2(10,37) 10,44 cw(c11,44) 11,45 34.8,45
  Bottom Layer w0.254: v1(45.5,3.5) 48.24,3.5 ccw(c48.24,3.76) P6.1
  Bottom Layer w0.3: v2(10,37) 11.5,37 cw(c11.5,36.5) 12,36.5 v1(12,11.5)
VIN: C11.2 L1.2 SW1.3 U4.5 | length 8.5
  Top Layer w1: 3.5,41.5 cw(c3.545,41.5) 3.545,41.545 C11.2 ; SW1.3 cw(c4.75,43.972) 5.58,43.972 L1.2
pads on no net: *.2 P3.3 SW1. SW1.1 U1.18 U1.19 U1.20 U1.23 U1.28 U2.5 U2.13 U2.14 U2.15 U2.16 U2.17 U2.18 U3.1 U3.7 U3.8 U3.12 U3.13 U3.15 U3.16 U3.21 U3.22 U3.23 U3.24 U4.2 U4.3 U4.4 U6.3 U6.7

## Polygon pours and split planes (outlines as drawn)
GND on Top Layer "TOP_GND" (solid, remove dead copper, shelved, pour order 10): 0,0 0,60 50,60 50,0
VCC on Top Layer "VCC_BME" (solid, shelved, pour order 13): 47.28,15.648 47.77,15.648 47.77,14.65 47.28,14.65
VCC on Top Layer "GPS_VCC" (solid, shelved, pour order 9): 3.393,29.172 3.393,30.972 5.298,30.972 5.298,29.172
GND on Bottom Layer "BOT_GND" (solid, remove dead copper, shelved, pour order 11): 0,0 0,60 50,60 50,0

## Keep-outs
Keep-Out Layer:
  rectangle: 0,0 11.5,8.6
  rectangle: 38.803,7.624 42.816,10.037
  region: 50,48 50,60 0,60 0,48

## Silkscreen, mask and mechanical layers (free items; w line width, h text height)
Top Overlay:
  lines w0.152: 1.5,13.75 1,13.75 1,15.75 1.5,15.75 ; 2.225,30.826 2.225,31.076 3.475,31.076 3.475,30.826 ; 2.5,16 2.25,16 2.25,19.25 2.5,19.25 ; 2.75,9 2.5,9 2.5,10.25 2.75,10.25 ; 4,42.5 4,42.75 7.25,42.75 7.25,42.5 ; 6,11.25 6.25,11.25 6.25,13.25 6,13.25 ; 6.25,34.75 6.5,34.75 6.5,38 6.25,38 ; 7,47.4 7,47.65 11,47.65 11,47.4 ; 7.5,38.75 7.5,38.5 9.5,38.5 9.5,38.75 ; 8.25,15.25 8.25,15 9.25,15 ; 10.75,14.5 11.75,14.5 11.75,14.75 ; 34.5,8.25 34.5,8 36.25,8 36.25,8.25 ; 34.75,42 34.75,42.25 35.75,42.25 ; 35.5,33.75 36.5,33.75 36.5,33.5 ; 35.75,6.5 35.75,5.5 36.5,5.5 ; 35.875,21 35.875,21.25 36.625,21.25 36.625,21 ; 36,12 35.75,12 35.75,13.75 36,13.75 ; 36.25,38.25 37,38.25 37,37.75 37,36 ; 36.25,38.75 36.25,39.5 36.5,39.5 37.75,39.5 ; 36.5,14.75 36.5,15 37.75,15 ; 36.75,9 36.5,9 36.5,10 36.75,10 ; 37.177,34.177 36.823,33.823 ; 38.25,4.25 38,4.25 38,5.75 38.25,5.75 ; 38.5,15 39.75,15 39.75,14.75 ; 40.5,4.25 40.75,4.25 40.75,5.75 40.5,5.75 ; 43,39 43,38.25 43.75,38.25 ; 43.25,4.25 43.5,4.25 43.5,5.75 43.25,5.75 ; 43.25,17.25 43.25,18 44.5,18 ; 44.5,6.5 44.5,6.25 44.75,6.25 46.25,6.25 46.25,6.5 ; 44.75,8.5 44.75,8.25 46.25,8.25 46.25,8.5 ; 44.75,10.75 46.5,10.75 46.5,10.5 ; 44.75,35.75 44.5,35.75 44.5,37.5 44.75,37.5 ; 47.25,40.75 47.5,40.75 47.5,44 47.25,44 ; 48.25,12.75 49,12.75 49,13.5 ; 48.25,16.5 49,16.5 49,15.75 ; 48.25,46.75 49,46.75 49,45.5 ; 36.823,33.823 36.823,34.177 37.177,33.823 36.823,33.823
  text "+" at 31.2,48.067 h0.8
  text "Solar" at 22.58,47.82 h0.5
  text "-" at 14.7,47.8 h0.8
  text "VCC" at 8.08,33.33 h0.5
  text "C" at 43.48,19.595 h0.5 r270
  text "D" at 44.78,19.595 h0.5 r270
  text "1" at 38.92,19.33 h0.5 r90
  text "VCC" at 35.08,0.33 h0.5
  text "GND" at 37.08,0.33 h0.5
Bottom Overlay:
  lines w0.152: 11.276,52.225 11.776,52.725 11.776,51.725 11.276,52.225 ; 11.276,52.225 14.276,52.225 14.276,55.225 ; 14.276,55.225 14.776,54.725 13.776,54.725 14.276,55.225
  text "DeSCENT CHIPSAT" at 25.076,57.925 h0.8
  text "Ver 2.3" at 21.076,56.425 h0.8
  text "Variant 1" at 25.196,54.805 h0.5
  text "BOARD SIZE: W = 50" at 25.196,53.805 h0.5
  text "H" at 14.856,53.645 h0.5 r180
  text "BOARD SIZE: H = 60" at 25.196,52.805 h0.5
  text "To user: Put R4 First" at 25.196,51.83 h0.5
  text "W" at 13.196,51.305 h0.5
  text "OFF" at 5.42,49.58 h0.5
  text "-" at 31.8,48.05 h0.8
  text "+" at 15.3,47.817 h0.8
  text "ON" at 5.17,44.58 h0.5
  text "GND" at 46.945,21.28 h0.5
  text "50" at 38.528,20.291 h0.5 r90
  text "RX" at 46.945,18.734 h0.5
  text "TX" at 46.945,16.187 h0.5
  text "L" at 37.116,14.804 h0.5 r90
  text "NRST" at 46.945,13.641 h0.5
  text "SWCLK" at 46.945,11.094 h0.5
  text "S" at 37.116,9.804 h0.5 r90
  text "WDIO" at 46.945,8.548 h0.5
  text "GND" at 46.945,6.001 h0.5
  text "O" at 37.116,4.804 h0.5 r90
  text "VCC" at 46.945,3.455 h0.5

## Text inside footprints (layer, text, board x,y; h text height)
U3: Top Overlay "*" at 37.764,10.322 h0.2
U6: Top Overlay "*" at 43.396,41.138 h1.27 r180